# Altium PCB KC_BaseBoard4CompareTest-V0.2.PcbDoc
Units mil, origin at the board's own origin, x right, y up, seen from the top; angles counter-clockwise.
Board outline 6800 x 3030 mil, 2 copper layers (Component Side, Bottom Layer), stack 12.8 mil thick; 68 components, 42 nets, 178 pads, 7 vias.
Unrouted connection lines stored in the file: 6.
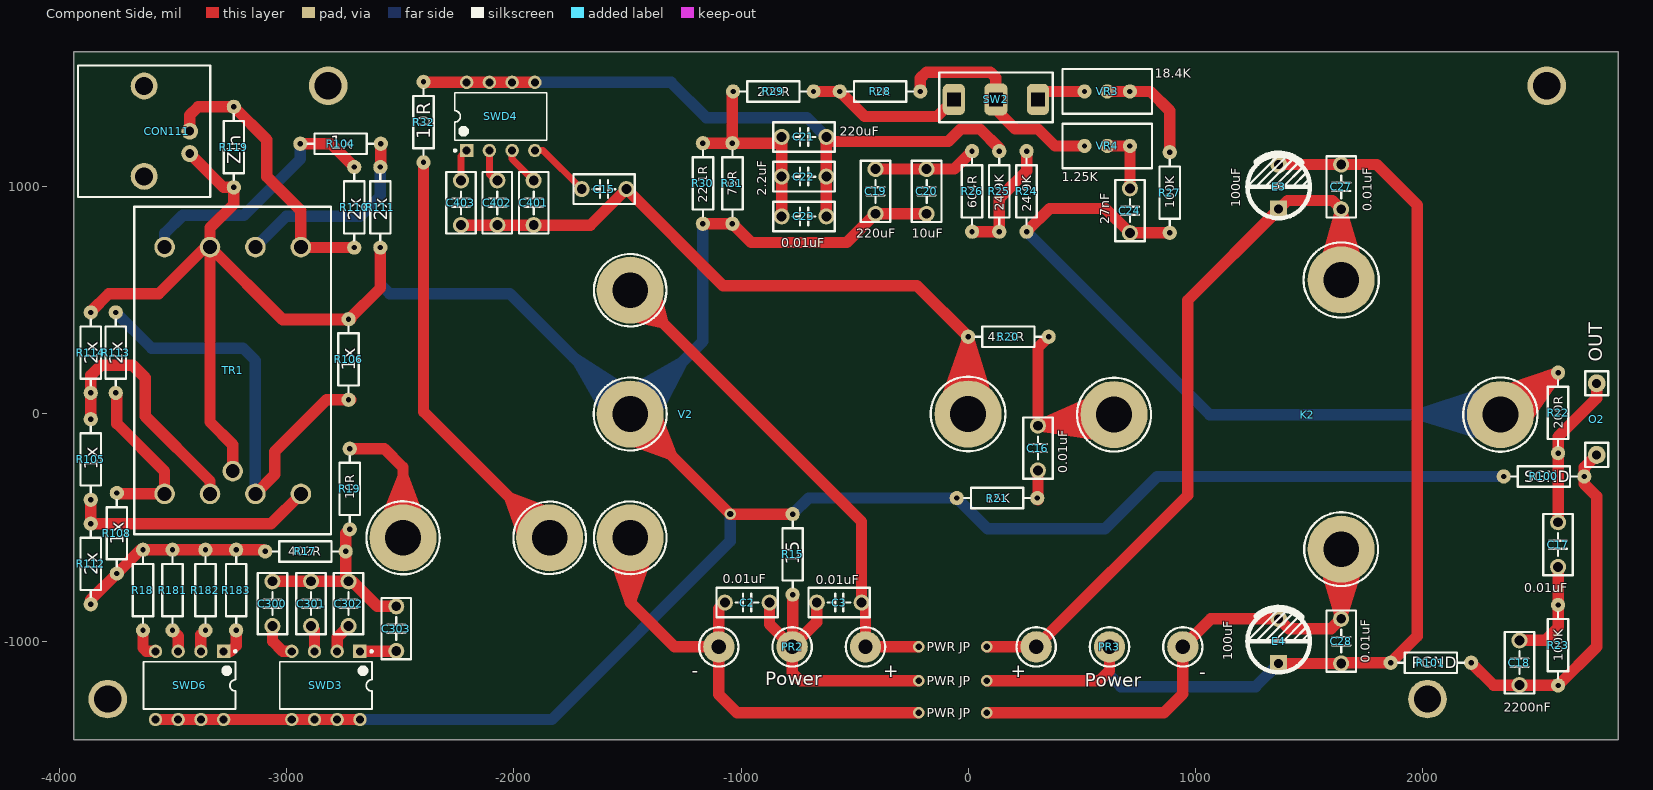
[diagram p0: Component Side view]
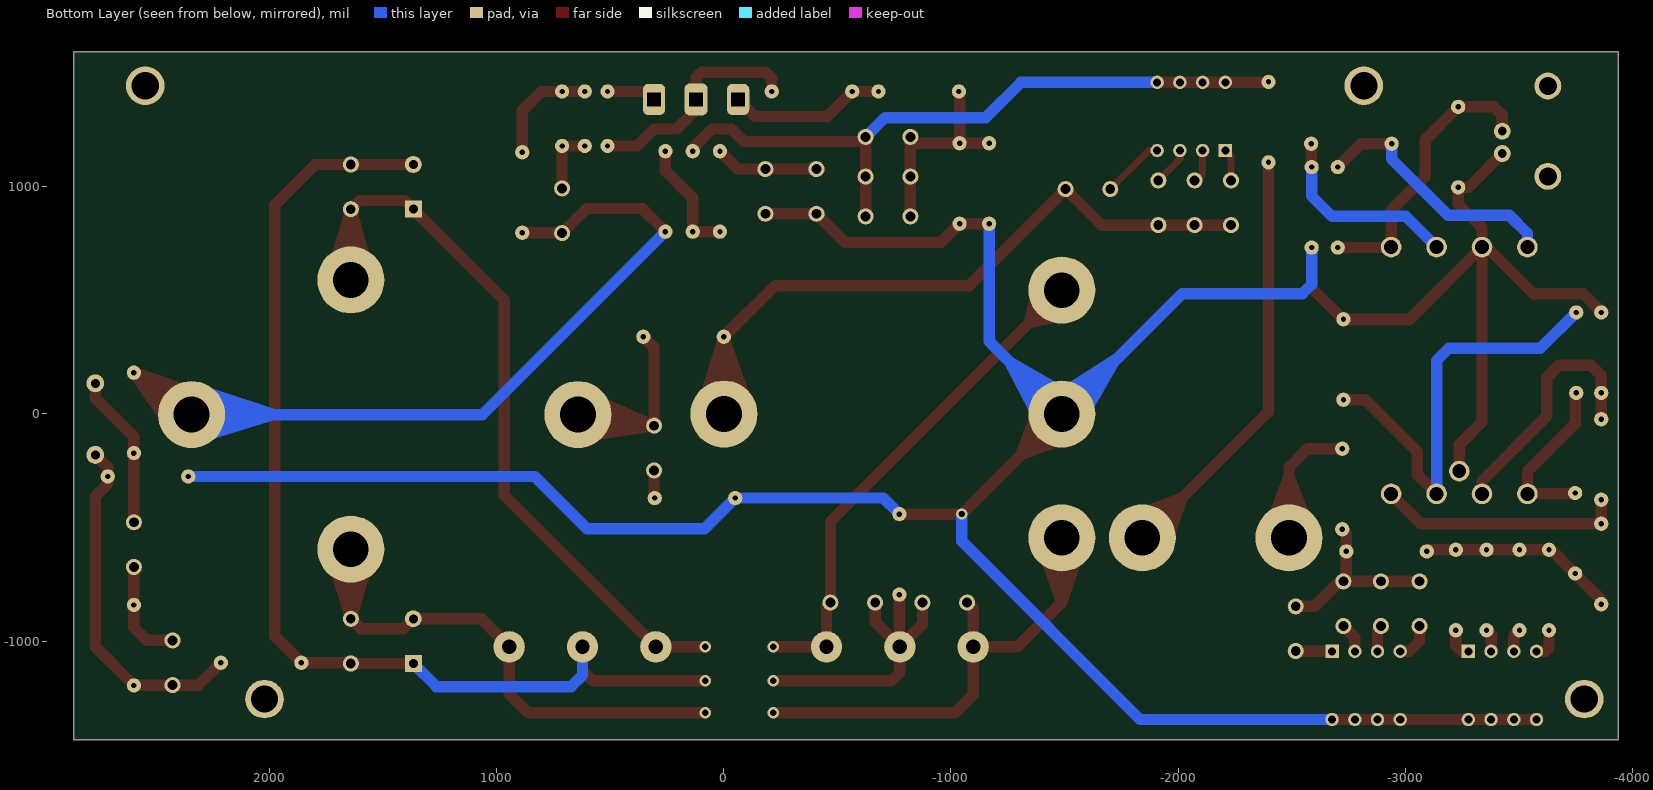
[diagram p1: Bottom Layer view, seen from below]
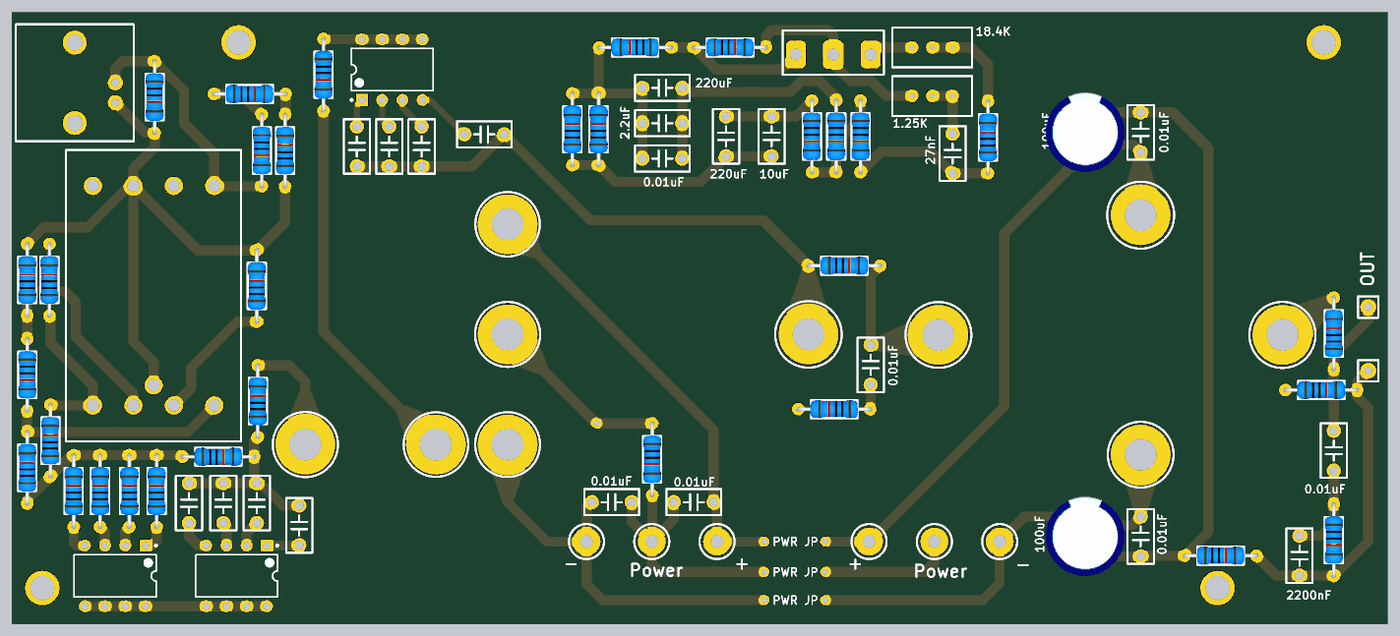
[diagram p2: 3D render of the assembled board from above, using the file's embedded part models]

## Layer stack, top to bottom
Top Solder: solder mask 0.4, Solder Resist, Dk 3.5
Component Side: signal copper 1.4
Dielectric 1: core 10, FR-4, Dk 4.2
Bottom Layer: signal copper 1.4
Solder Side: solder mask 0.4, Solder Resist, Dk 3.5

## Board outline
-3937.83,-1435.33 -3937.83,1594.67 2862.17,1594.67 2862.17,-1435.33

## Design rules (kind name [scope] priority, off if disabled: settings)
Clearance [All] p1: gap=10 ignorepadtopadclearanceinfootprint=FALSE except(0: Arc-Hole Track-Hole SMDPad-Hole THPad-Hole Via-Hole Fill-Hole Poly-Hole Region-Hole Text-Hole)
PolygonConnect [All] p1: connectstyle=Relief reliefconductorwidth=10 reliefentries=4 polygonreliefangle="90 Angle" airgapwidth=10
RoutingVias [All] p1: holewidth=28 width=50 viastyle="Through Hole" minholewidth=28 minwidth=50 maxholewidth=28 maxwidth=50
SolderMaskExpansion [All] p1: expansion=4
Width [All] p1: maxlimit=500 minlimit=10 preferedwidth=50
30 further rules are at their usual default settings.

## Components (designator, comment, footprint, x,y, rotation, side; value= is the part's Value field where it differs from the comment)
C2 "0.01uF" "CBB 6.3*6.3*5" -972.83,-830.33 r0 top
C3 "0.01uF" "CBB 6.3*6.3*5" -567.83,-830.33 r180 top
C15 "100pF" "CBB 6.3*6.3*5" -1602.83,989.67 r0 top
C16 "0.01uF" "CBB 6.3*6.3*5" 307.17,-150.33 r270 top
C17 "0.01uF" "CBB 6.3*6.3*5" 2597.17,-575.33 r90 top
C18 "2200nF" "CBB 6.3*6.3*5" 2427.17,-1095.33 r270 top
C19 "220uF" "CBB 6.3*6.3*5" -407.83,979.67 r270 top
C20 "10uF" "CBB 6.3*6.3*5" -182.83,979.67 r270 top
C21 "220uF" "CBB 6.3*6.3*5" -722.83,1219.67 r180 top
C22 "2.2uF" "CBB 6.3*6.3*5" -722.83,1044.67 r180 top
C23 "0.01uF" "CBB 6.3*6.3*5" -722.83,869.67 r180 top
C24 "27nF" "CBB 6.3*6.3*5" 712.17,894.67 r90 top
C27 "0.01uF" "CBB 6.3*6.3*5" 1642.17,999.67 r90 top
C28 "0.01uF" "CBB 6.3*6.3*5" 1642.17,-1000.33 r270 top
C300 "100pF" "CBB 6.3*6.3*5" -3062.83,-835.33 r90 top
C301 "100pF" "CBB 6.3*6.3*5" -2892.83,-835.33 r90 top
C302 "100pF" "CBB 6.3*6.3*5" -2727.83,-835.33 r90 top
C303 "20pF" "CBB 6.3*6.3*5" -2517.83,-945.33 r90 top
C401 "100pF" "CBB 6.3*6.3*5" -1912.83,929.67 r270 top
C402 "100pF" "CBB 6.3*6.3*5" -2072.83,929.67 r270 top
C403 "20pF" "CBB 6.3*6.3*5" -2232.83,929.67 r270 top
CON111 "RCA" RCA-RJ255 -3627.83,1244.67 r0 top
E3 "100uF" "CAP 5.0*6.5*12.5" 1367.17,999.67 r90 top
E4 "100uF" "CAP 5.0*6.5*12.5" 1367.17,-1000.33 r90 top
K2 "KCBuff" KCBUFF_M4 642.27,-2.83 r0 top
O2 "OUT" SIGNAL_TERMINAL 2767.17,134.67 r270 top
PR2 "Power" KC_MBPOWERREG4COMPARE-1.5MM -775,-1025.33 r270 top
PR3 "Power" KC_MBPOWERREG4COMPARE-1.5MM 622.17,-1025.33 r90 top
R15 "15" "RS 1/4W" -772.83,-618.17 r270 top
R17 "402R" "RS 1/4W" -2917.83,-605.33 r0 top
R18 "270K" "RS 1/4W" -3632.83,-775.33 r90 top
R19 "10R" "RS 1/4W" -2722.83,-330.33 r90 top
R20 "45.3R" "RS 1/4W" 177.17,339.67 r0 top
R21 "15K" "RS 1/4W" 127.17,-370.33 r180 top
R22 "200R" "RS 1/4W" 2597.17,4.67 r90 top
R23 "100K" "RS 1/4W" 2597.17,-1018.17 r270 top
R24 "24.9K" "RS 1/4W" 257.17,979.67 r270 top
R25 "24.9K" "RS 1/4W" 137.17,979.67 r270 top
R26 "604R" "RS 1/4W" 17.17,979.67 r270 top
R27 "100K" "RS 1/4W" 887.17,974.67 r90 top
R28 "1K" "RS 1/4W" -387.83,1419.67 r0 top
R29 "200R" "RS 1/4W" -857.83,1419.67 r180 top
R30 "22.1R" "RS 1/4W" -1167.83,1014.67 r90 top
R31 "75R" "RS 1/4W" -1037.83,1014.67 r90 top
R32 "10R" "RS 1/4W" -2397.83,1284.67 r270 top
R100 "SGND" "RS 1/4W" 2535,-275.33 r0 top
R101 "PGND" "RS 1/4W" 2037.17,-1095.33 r0 top
R104 "1x" "RS 1/4W" -2762.83,1189.67 r0 top
R105 "1x" "RS 1/4W" -3862.83,-200.33 r270 top
R106 "1x" "RS 1/4W" -2727.83,239.67 r90 top
R108 "1x" "RS 1/4W" -3747.83,-525.33 r90 top
R110 "2x" "RS 1/4W" -2702.83,909.67 r270 top
R111 "2x" "RS 1/4W" -2587.83,909.67 r90 top
R112 "2x" "RS 1/4W" -3862.83,-660.33 r90 top
R113 "2x" "RS 1/4W" -3752.83,269.67 r90 top
R114 "2x" "RS 1/4W" -3862.83,269.67 r90 top
R119 "Zin" "RS 1/4W" -3232.83,1174.67 r270 top
R181 "182K" "RS 1/4W" -3502.83,-775.33 r90 top
R182 "100K" "RS 1/4W" -3357.83,-775.33 r90 top
R183 "47K" "RS 1/4W" -3222.83,-775.33 r90 top
SW2 "SW-3P-2S" SS-12D06 122.17,1384.67 r0 top
SWD3 "SW-DIP4" DIP-8 -2827.83,-1195.33 r270 top
SWD4 "SW-DIP4" DIP-8 -2057.83,1309.67 r90 top
SWD6 "SW-DIP4" DIP-8 -3427.83,-1195.33 r270 top
TR1 "LL1527" LL1527 -3237.83,191.36 r270 top
V2 "KCInputVas" KCIN_VAS_M4 -2487.83,-545.33 r0 top
VR3 "18.4K" "RS 1/2W-VR" 612.17,1419.67 r180 top
VR4 "1.25K" "RS 1/2W-VR" 612.17,1179.67 r180 top

## Footprints (in the part's own frame and the unit in brackets; to place one, negate y for a bottom-side part, rotate by r counter-clockwise, add the part's x,y. Pads: shape width x height; smd on the part's side, far side on the other; paste and mask are expansions set on the pad)
"CAP 5.0*6.5*12.5" [mm] "脚距5mm直径10mm高度12.5mm"
  rect 1.9x1.9 hole 1: 1(-2.5,0)
  round 1.9 hole 1: 2(2.5,0)
  silkscreen extent -3.5,-3.5 3.7,3.56, body extent -5,-5.01 5.01,4.99, height 12.55
"CBB 6.3*6.3*5" [mm] "脚距5mm高6.3mm厚3mm"
  round 1.8 hole 1.1: 1(-2.5,0) 2(2.5,0)
  silkscreen extent -3.43,-1.65 3.43,1.65, body extent -3.15,-1.5 3.15,1.5, height 6.8
DIP-8 [mm] "DIP; 8 Leads; Row Spacing 7.62 mm; Pitch 2.54 mm"
  rect 1.5x1.5 hole 0.9: 1(-3.81,3.81)
  round 1.5 hole 0.9: 2(-3.81,1.27) 3(-3.81,-1.27) 4(-3.81,-3.81) 5(3.81,-3.81) 6(3.81,-1.27) 7(3.81,1.27) 8(3.81,3.81)
  silkscreen extent -3.93,-5.15 2.65,5.24, body extent -3.6,-5.15 3.6,5.15, height 5.08
KC_MBPOWERREG4COMPARE-1.5MM [mm] "1.5mm hole size"
  round 3.5 hole 1.6: 1(0,8.2) 2(0,-8.2) 3(0,0)
  silkscreen extent -2.2,-10.4 2.2,10.4
KCBUFF_M4 [mm]
  round 7.5 hole 4: 1(0,0) 2(43.199,0) 3(25.397,15.05) 4(25.397,-15.05)
  silkscreen extent -4.13,-19.18 47.35,19.25
KCIN_VAS_M4 [mm]
  round 7.5 hole 4: 1(0,0) 2(16.396,0) 3(25.4,27.686) 4(25.4,0) 5(25.4,13.843) 6(63.183,13.843)
  silkscreen extent -4.09,-4.09 67.36,31.73
LL1527 [mm] "Lundahl LL1527"
  round 2.3 hole 1.55: 1(-13.8,-7.62) 2(-13.8,-2.54) 3(-13.8,2.54) 4(-13.8,7.62) 5(13.8,-7.62) 6(13.8,-2.54) 7(13.8,2.54) 8(13.8,7.62) 9(11.26,0)
  silkscreen extent -18.3,-11 18.3,11
RCA-RJ255 [mm] "RCA Socket"
  round 1.9 hole 1: 1(5.1,0) 2(5.1,-2.5)
  round 3 hole 2.02: 2(0,-5.05) 2(0,5.05)
  silkscreen extent -7.4,-7.35 7.4,7.35
"RS 1/2W-VR" [mm] "直插3脚顶调可调电阻，脚距2.54mm，长10mm*宽5mm*高10mm"
  round 1.6 hole 0.6: 1(-2.54,0) 2(2.54,0) 3(0,0)
  silkscreen extent -5,-2.5 5,2.5
"RS 1/4W" [mm] "直插色环电阻，脚距9mm，直径2.3mm"
  round 1.6 hole 0.6: 1(-4.5,0) 2(4.5,0)
  silkscreen extent -3.68,-1.14 3.68,1.14, body extent -4.72,-1.16 4.73,1.16, height 2.32
SIGNAL_TERMINAL [mm] "Signal Path Pin"
  round 2 hole 1: 1(0,0) 2(8,0)
  silkscreen extent -1.35,-1.3 9.35,1.3
SS-12D06 [mm]
  rrect50% 2.5x3.5 hole 1.5 square: 1(-4.7,0) 3(4.7,0)
  rrect50% 2.6x3.6 hole 1.5 square: 2(0,0)
  silkscreen extent -6.35,-2.54 6.35,3

## Part data
C2 C3 C15 C16 C17 C18 C19 C20 C21 C22 C23 C24 C27 C28 C300 C301 C302 C303 C401 C402 C403: library part C-CBB, "CBB电容", BOM名称=CBB电容, 学习资源=www.ooocke.com, 版权归属=源创客
CON111: "RCA Connector", Publisher="Altium Limited", Revision="17-Jul-2002: Re-released for DXP Platform."
E3 E4: library part C-CAP, "直插电解电容", BOM名称=直插电解电容, 学习资源=www.ooocke.com, 版权归属=源创客
K2: "King Cello Buffer Stage"
O2: library part Signal_Out, "Signal Out"
PR2 PR3: library part MainBoardPowerRegulator4CompareTest, "King Cello Compare Test Power"
R15 R17 R18 R19 R20 R21 R22 R23 R24 R25 R26 R27 R28 R29 R30 R31 R32 R100 R101 R104 R105 R106 R108 R110 R111 R112 R113 R114 R119 R181 R182 R183: library part R-CRR, "直插色环电阻", BOM名称=色环电阻, 学习资源=www.ooocke.com, 版权归属=源创客
SW2: "3 Pin 2 Switch"
SWD3 SWD4 SWD6: "DIP Switch", LatestRevisionDate=17-Jul-2002, LatestRevisionNote="Re-released for DXP Platform.", PackageReference=DIP-8, Published=24-Mar-1999, Publisher="Altium Limited"
TR1: "Lundahl LL1527"
V2: "King Cello Input Stage and VAS"
VR3 VR4: library part VR-W, "直插可调电阻-顶调"

## Free pads (board coordinates)
  round 170 hole 120: 2(-3787.83,-1255.33) 2(-2817.83,1444.67) 2(2022.17,-1255.33) 2(2547.17,1444.67)

## Via types
v1: diameter 50, hole 28, Component Side to Bottom Layer, 7 vias

## Nets (pads, with @x,y where several pads share a name; then routed paths per layer and width w, separated by ;. In a path a pad name is that pad's centre, name@x,y a point inside that pad or via, vN(x,y) a via of type N, cw(c..) or ccw(c..) an arc to the next point about the centre after c; other vN are vias at no path point)
GND: C2.2 C3.2 C27.2 C28.2 E3.2 E4.1 PR2.3 PR3.3 R15.2 R101.1 | length 6227.6
  Component Side w50: C2.2 -874.41,-925.93 PR2.3 ; R15.2 PR2.3@-772.83,-1023.17 ; C3.2 -666.26,-916.59 PR2.3@-772.83,-1023.17 ; v1(-217.83,-1175.33) -737.83,-1175.33 -775,-1138.17 PR2.3 ; v1(82.17,-1175.33) 577.17,-1175.33 622.17,-1130.33 PR3.3 ; E4.1 C28.2 1645.59,-1095.33 R101.1 1977.17,-978.17 1977.17,919.67 1798.74,1098.09 C27.2 E3.2 ; PR2.3 PR2.3@-772.83,-1023.17
  Bottom Layer w50: PR3.3 622.17,-1150.33 672.17,-1200.33 1265.59,-1200.33 E4.1
NetC2_1: C2.1 C28.1 E4.2 K2.4 PR2.2 PR3.2 V2.4 | length 5194
  Component Side w50: V2.4@-1557.83,-625.33 -1487.83,-830.33 ; V2.4 -1487.83,-830.33 ; V2.4@-1407.83,-610.33 -1487.83,-830.33 ; C2.1 -1097.83,-856.91 PR2.2 ; v1(-217.83,-1315.33) -1017.83,-1315.33 -1097.83,-1235.33 PR2.2 ; v1(82.17,-1315.33) 862.17,-1315.33 945,-1232.5 PR3.2 1068.43,-901.91 E4.2 1410.59,-945.33 1598.74,-945.33 C28.1 ; K2.4@1577.17,-685.33 C28.1 ; K2.4 C28.1 ; K2.4@1712.17,-675.33 C28.1 ; -1487.83,-830.33 -1292.83,-1025.33 PR2.2
NetC3_1: C3.1 C27.1 E3.1 K2.3 PR2.1 PR3.1 V2.3 | length 6280.5
  Component Side w50: V2.3@-1522.83,439.67 -1511.72,437.19 -1342.83,399.67 ; V2.3 -1342.83,399.67 ; V2.3@-1382.83,554.67 -1342.83,399.67 ; v1(-217.83,-1025.33) PR2.1 -452.17,-847.58 C3.1 -469.41,-473.76 -1342.83,399.67 ; v1(82.17,-1025.33) PR3.1 967.17,-357.5 967.17,501.24 E3.1 1405.59,939.67 1603.74,939.67 C27.1 ; K2.3@1572.17,659.67 C27.1 ; K2.3 C27.1 ; K2.3@1712.17,664.67 C27.1
NetC15_1: C15.1 SWD4.4 | length 277
  Component Side w30: SWD4.4 -1871.26,1159.67 C15.1
NetC15_2: C15.2 C401.2 C402.2 C403.2 R20.1 V2.6 | length 4030
  Component Side w50: C403.2 C402.2 C401.2 -1662.83,831.24 C15.2 -1079.41,564.67 -225,564.67 R20.1 ; V2.6@-92.83,69.67 R20.1 ; V2.6@-57.83,84.67 R20.1 ; V2.6 0,0 R20.1 ; V2.6@57.17,84.67 R20.1 ; V2.6@92.17,39.67 R20.1
NetC16_1: C16.1 K2.1 R20.2 | length 1505.6
  Component Side w50: R20.2 307.17,292.5 C16.1 ; K2.1@537.17,-5.33 C16.1 ; K2.1@537.17,49.67 C16.1 ; K2.1@557.17,-90.33 C16.1 ; K2.1 593.19,-51.91 C16.1
NetC16_2: C16.2 R21.1 | length 129.4
  Component Side w50: R21.1@307.17,-378.17 C16.2
NetC17_1: C17.1 C17.2 C18.1 O2.1 R22.1 R23.1 | length 1142
  Component Side w50: C18.1 2540.59,-996.91 2597.17,-940.33 R23.1 C17.1 ; C17.2 R22.1 2597.17,-100.33 2767.17,69.67 O2.1
NetC18_2: C18.2 O2.2 R23.2 R100.2 R101.2 | length 1555.3
  Component Side w50: R101.2 2312.76,-1193.76 C18.2 2595.59,-1193.76 R23.2 2767.17,-1025.33 2767.17,-363.17 2712.17,-308.17 R100.2 2712.17,-235.3 O2.2
NetC19_1: C19.1 C20.1 R26.1 | length 457.6
  Component Side w50: C19.1 C20.1 -61.57,1078.09 R26.1
NetC19_2: C19.2 C20.2 CON111.2 R15.1 R21.2 R30.1 R31.1 R100.1 R106.2 R111.1 R114.2 R119.2 SWD3.5 SWD3.6 SWD3.7 SWD3.8 SWD6.5 SWD6.6 SWD6.7 SWD6.8 TR1.2 TR1.9 V2.5 | length 16248.5
  Component Side w50: R114.2@-3862.83,449.67 -3782.83,529.67 -3562.83,529.67 -3357.83,734.67 TR1.2 ; SWD6.5 SWD6.6 SWD6.7 SWD6.8 SWD3.5 SWD3.6 SWD3.7 SWD3.8 ; CON111.2@-3427.05,1146.24 -3278.31,997.5 R119.2 -3232.83,924.67 -3337.83,819.67 TR1.2 ; TR1.9 -3237.83,-135.33 -3337.83,-35.33 TR1.2 ; R106.2@-2717.83,416.83 R106.2@-2725.67,416.83 ; R111.1 -2587.83,554.67 R106.2@-2725.67,416.83 ; V2.5 -1307.83,-180.33 ; V2.5@-1482.83,-115.33 -1307.83,-180.33 ; V2.5@-1367.83,-25.33 -1307.83,-180.33 ; R30.1 R31.1 -955,754.67 -534.41,754.67 C19.2 C20.2 ; R15.1 -1047.17,-441 v1(-1047.83,-440.33) -1307.83,-180.33 ; TR1.2 -3020,416.83 ; -3020,416.83 -3017.83,414.67 -2727.83,414.67 R106.2@-2725.67,416.83 ; -3020,416.83 R106.2 R106.2@-2725.67,416.83
  Bottom Layer w50: SWD3.8 -1832.83,-1345.33 -1047.83,-560.33 v1(-1047.83,-440.33) ; R111.1 -2587.83,569.67 -2547.83,529.67 -2017.83,529.67 -1737.83,249.67 ; V2.5@-1577.83,-15.33 -1717.83,229.67 ; V2.5@-1497.83,94.67 -1737.83,249.67 ; V2.5@-1472.83,104.67 -1257.83,229.67 ; V2.5@-1432.83,119.67 -1257.83,229.67 ; V2.5@-1392.83,24.67 -1257.83,229.67 ; V2.5@-1372.83,9.67 -1257.83,229.67 ; R30.1 -1167.83,319.67 -1257.83,229.67 ; R15.1 -702.17,-370.33 R21.2 85,-505.33 602.17,-505.33 832.17,-275.33 R100.1 ; -1737.83,249.67 -1717.83,229.67 ; -1717.83,229.67 V2.5 -1257.83,229.67
NetC21_1: C21.1 C22.1 C23.1 R25.1 R32.1 SWD4.5 SWD4.6 SWD4.7 SWD4.8 | length 3067.5
  Component Side w50: R32.1 -2395.67,1459.67 SWD4.8 ; SWD4.8@-2210,1461.83 SWD4.8 ; SWD4.5 SWD4.6 SWD4.7 SWD4.8 ; C23.1 C22.1 C21.1 -604.41,1199.67 -87.83,1199.67 -32.83,1254.67 52.17,1254.67 137.17,1169.67 R25.1
  Bottom Layer w50: SWD4.5 -1307.83,1459.67 -1152.83,1304.67 -709.41,1304.67 C21.1
NetC21_2: C21.2 C22.2 C23.2 R29.2 R30.2 R31.2 | length 937.1
  Component Side w50: R30.2 R31.2 ; R29.2 -1037.83,1416.83 R31.2 ; C23.2 C22.2 C21.2 -849.09,1191.83 R31.2
NetC24_1: C24.1 K2.2 R22.2 R24.2 R27.1 | length 5253.8
  Component Side w50: R24.2 359.33,904.67 603.74,904.67 C24.1 713.43,797.5 R27.1 ; K2.2 2412.5,-2.83 R22.2 ; K2.2@2382.17,109.67 R22.2 ; K2.2@2417.17,84.67 R22.2 ; K2.2@2457.17,-20.33 R22.2
  Bottom Layer w50: R24.2 1062.5,-2.83 1982.17,-2.83 ; K2.2@2237.17,-55.33 1982.17,-2.83 ; K2.2@2247.17,54.67 1982.17,-2.83 ; K2.2@2252.17,-85.33 1982.17,-2.83 ; K2.2@2262.17,89.67 1982.17,-2.83 ; K2.2 1982.17,-2.83
NetC24_2: C24.2 VR4.1 VR4.3 | length 286.6
  Component Side w50: VR4.3 VR4.1 C24.2
NetC300_1: C300.1 SWD3.4 | length 170.2
  Component Side w50: C300.1 -3062.83,-1000.33 -3017.83,-1045.33 SWD3.4
NetC300_2: C300.2 C301.2 C302.2 C303.2 R17.2 R19.1 | length 832.7
  Component Side w50: C300.2 C301.2 C302.2 ; R19.1 -2740.67,-525.33 R17.2 -2740.67,-724.07 C302.2 ; C303.2 -2601.26,-846.91 -2711.26,-736.91 C302.2
NetC301_1: C301.1 SWD3.3 | length 117.8
  Component Side w50: C301.1 -2877.83,-948.76 SWD3.3
NetC302_1: C302.1 SWD3.2 | length 132.3
  Component Side w50: SWD3.2 -2777.83,-983.76 C302.1
NetC303_1: C303.1 SWD3.1 | length 160.7
  Component Side w50: SWD3.1 -2519.41,-1045.33 C303.1
NetC401_1: C401.1 SWD4.3 | length 170.9
  Component Side w30: SWD4.3 -2007.83,1123.09 C401.1
NetC402_1: C402.1 SWD4.2 | length 151
  Component Side w30: SWD4.2 -2107.83,1054.67 -2081.26,1028.09 C402.1
NetC403_1: C403.1 SWD4.1 | length 141.9
  Component Side w30: C403.1 -2232.83,1134.67 SWD4.1
NetCON111_1: CON111.1 R110.2 R119.1 TR1.4 | length 1255.3
  Component Side w50: CON111.1 -3427.05,1315.45 -3390.67,1351.83 R119.1 -3087.83,1206.83 -3087.83,1044.67 -2937.83,894.67 TR1.4 -2935.67,732.5 R110.2
NetR17_1: R17.1 R18.2 R108.1 R112.1 R181.2 R182.2 R183.2 | length 881.7
  Component Side w50: R112.1 -3862.83,-817.5 R108.1 -3643.5,-598.17 R18.2 R181.2 R182.2 R183.2 -3102.17,-598.17 R17.1
NetR18_1: R18.1 SWD6.4 | length 139
  Component Side w50: R18.1 -3632.83,-1030.33 -3617.83,-1045.33 SWD6.4
NetR19_2: R19.2 V2.1 | length 933.7
  Component Side w50: R19.2 -2570,-153.17 -2487.83,-235.33 -2487.83,-275.33 ; V2.1@-2552.83,-440.33 -2487.83,-275.33 ; V2.1 -2487.83,-275.33 ; V2.1@-2425.57,-441.36 -2487.83,-275.33
NetR24_1: R24.1 R25.2 R26.2 | length 524
  Component Side w50: R26.2 R25.2 137.17,949.67 257.17,1069.67 R24.1
NetR27_2: R27.2 VR3.1 VR3.3 | length 493
  Component Side w50: VR3.3 VR3.1 802.17,1419.67 887.17,1334.67 R27.2
NetR28_1: R28.1 R29.1 SW2.1 | length 694.4
  Component Side w50: R29.1 R28.1 -455,1309.67 -137.87,1309.67 SW2.1
NetR28_2: R28.2 SW2.2 VR4.2 | length 1008.6
  Component Side w50: R28.2 -210.67,1477.5 -183.5,1504.67 97.17,1504.67 122.17,1479.67 SW2.2 122.17,1339.67 207.17,1254.67 307.17,1254.67 382.17,1179.67 VR4.2
NetR32_2: R32.2 V2.2 | length 2426.6
  Component Side w50: R32.2@-2400.67,1107.5 -2397.83,1104.67 -2397.83,10.17 -2017.58,-370.08 ; V2.2@-1922.83,-635.33 -1942.24,-581.02 -2017.58,-370.08 ; V2.2 -2017.58,-370.08 ; V2.2@-1772.83,-460.33 -1806.42,-447.95 -2017.58,-370.08
NetR104_1: R104.1 R110.1 TR1.1 | length 1140.6
  Component Side w50: R104.1 -2805.67,1189.67 R110.1
  Bottom Layer w50: TR1.1 -3537.83,794.67 -3457.83,874.67 -3187.83,874.67 -2940,1122.5 R104.1
NetR104_2: R104.2 R111.2 TR1.3 | length 874.1
  Component Side w50: R111.2 -2585.67,1089 R104.2
  Bottom Layer w50: TR1.3 -3002.83,869.67 -2677.83,869.67 -2587.83,959.67 R111.2
NetR105_1: R105.1 R114.1 TR1.6 | length 1103.9
  Component Side w50: R105.1 R114.1 -3862.83,169.67 -3817.83,214.67 -3677.83,214.67 -3622.83,159.67 -3622.83,-10.33 -3337.83,-295.33 TR1.6
NetR105_2: R105.2 R112.2 TR1.8 | length 1085
  Component Side w50: R105.2 R112.2 -3069.05,-483.17 TR1.8
NetR106_1: R106.1 R113.2 TR1.7 | length 1940.7
  Component Side w50: TR1.7 -3052.83,-266.95 -3052.83,-165.33 -2825,62.5 R106.1 R106.1@-2717.83,62.5
  Bottom Layer w50: R113.2 -3595.67,289.67 -3192.83,289.67 -3137.83,234.67 TR1.7
NetR108_2: R108.2 R113.1 TR1.5 | length 745.1
  Component Side w50: R113.1 -3747.83,87.5 -3747.83,-42.5 -3537.83,-252.5 TR1.5 -3744.05,-351.95 R108.2
NetR181_1: R181.1 SWD6.3 | length 103.2
  Component Side w50: R181.1 -3477.83,-977.5 SWD6.3
NetR182_1: R182.1 SWD6.2 | length 101.1
  Component Side w50: SWD6.2 -3377.83,-972.5 R182.1
NetR183_1: R183.1 SWD6.1 | length 133.2
  Component Side w50: SWD6.1 -3247.83,-1045.33 -3222.83,-1020.33 R183.1
NetSW2_3: SW2.3 VR3.2 | length 219.5
  Component Side w50: SW2.3 342.2,1419.67 VR3.2

## Silkscreen, mask and mechanical layers (free items; w line width, h text height)
Top Overlay:
  text "PWR JP" at -182.83,-1045.33 h40
  text "-" at -1217.83,-1160.33 h60
  text "+" at -372.83,-1160.33 h60
  text "+" at 187.17,-1160.33 h60
  text "-" at 1017.17,-1165.33 h60
  text "PWR JP" at -182.83,-1195.33 h40
  text "PWR JP" at -182.83,-1335.33 h40
Mechanical 1:
  the board outline again, w10
Drill Drawing:
  the board outline again, w10